# EAGLE board Nano XBee (EAGLE 7.0.0)
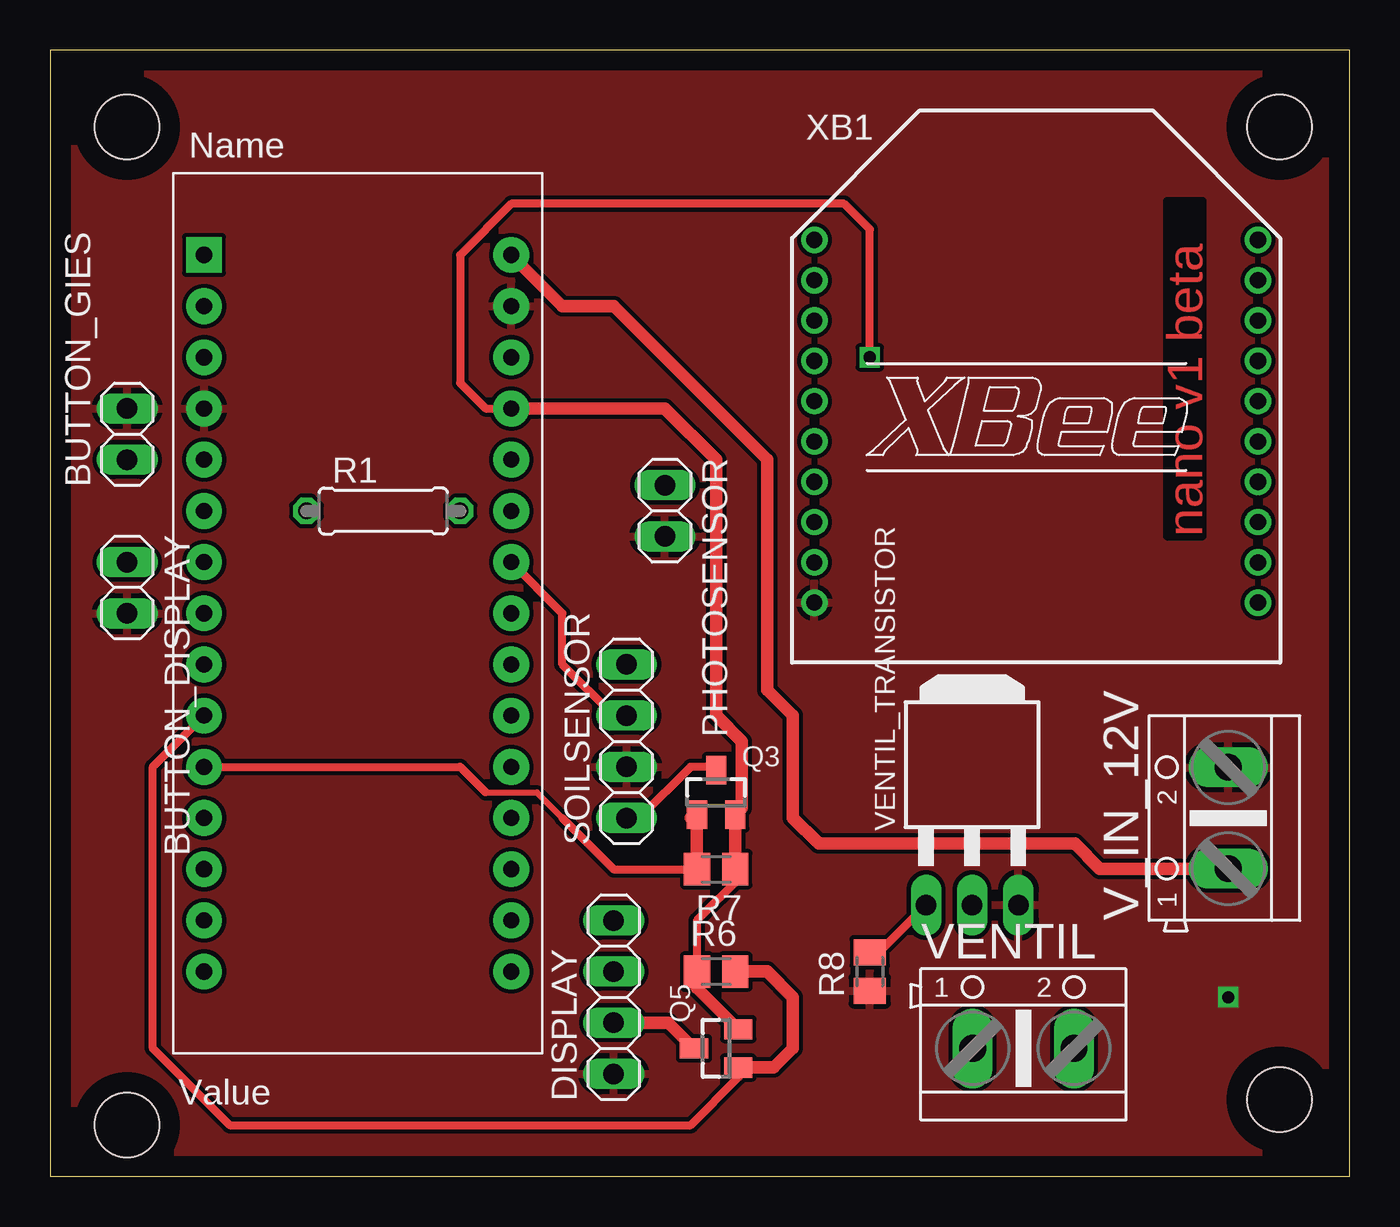
[diagram p0: board, top side]
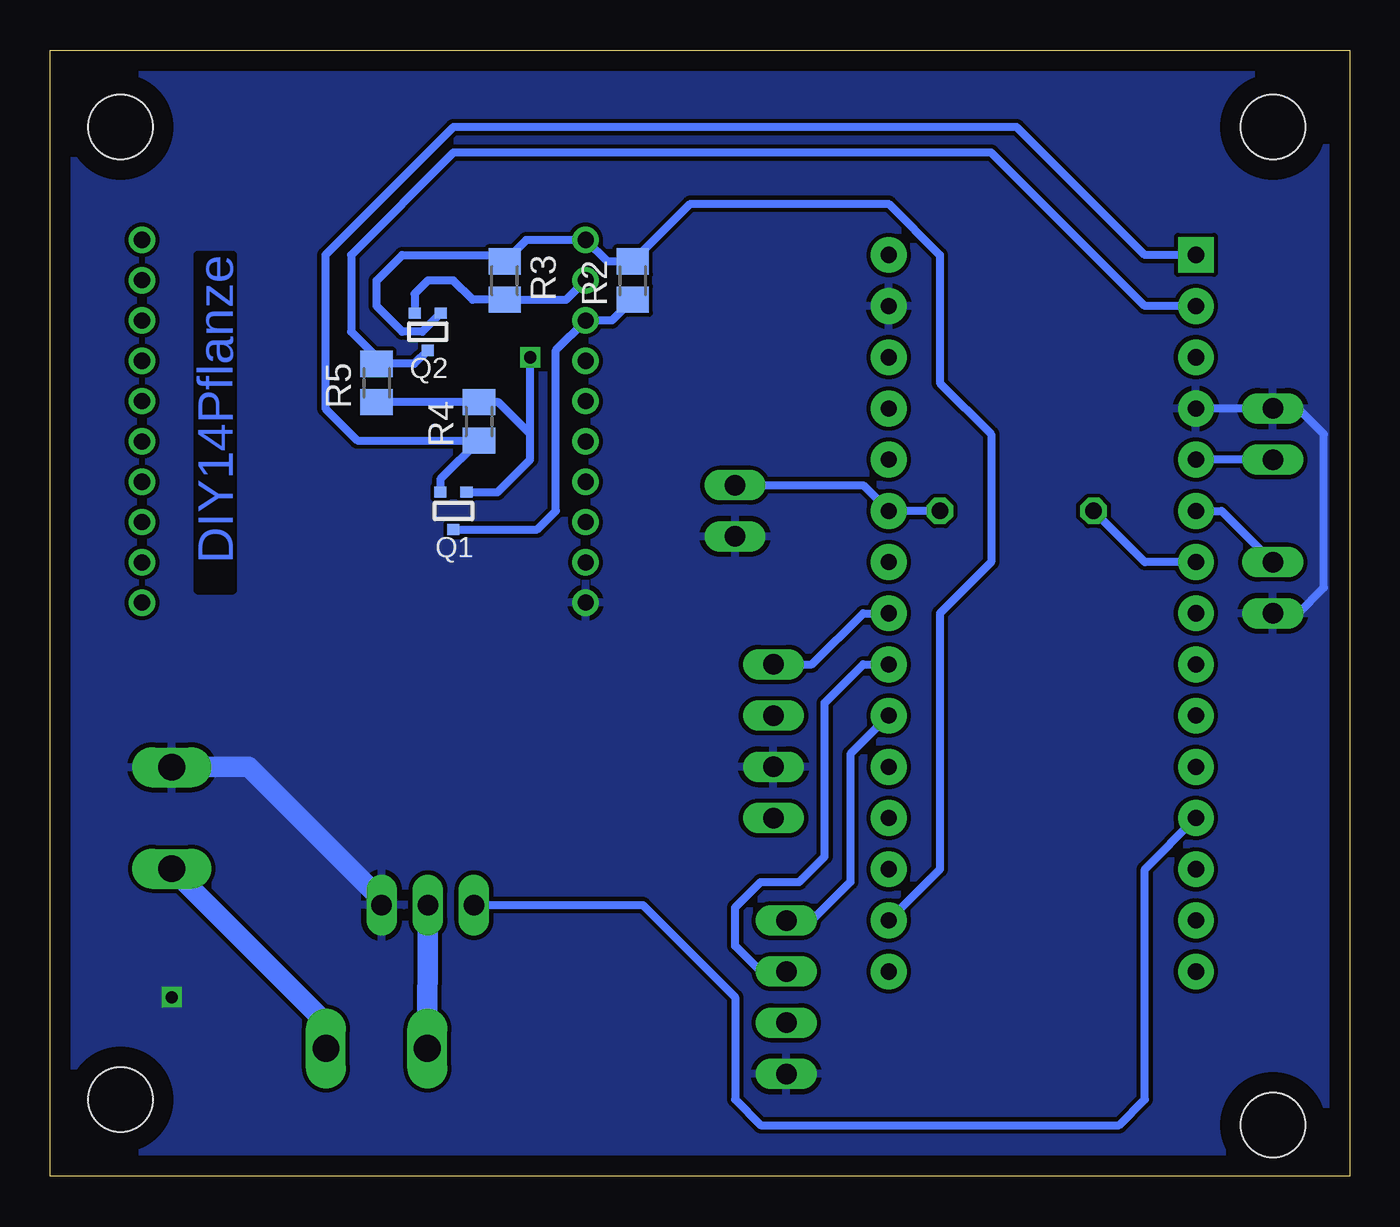
[diagram p1: board, bottom side, seen from below]

Size 64.44 x 55.87 mm. Coordinates in mm from the lower left corner, seen from the top.
Outline: 0,0 64.44,0 64.44,55.87 0,55.87 0,0
Copper layers (1*16): Top 0.035mm / dielectric 1.5mm / Bottom 0.035mm
Design rules "default": minimum track width 10mil, minimum drill 24mil, track to track 8mil, track to pad 8mil, pad to pad 8mil, via to via 8mil, smd to smd 8mil, copper to edge 40mil, drill to drill 8mil, minimum pad ring 10mil, minimum via ring 8mil, stop-mask expansion 4mil, vias tented up to drill 0mil, thermal gap 10mil
Holes 3.2 mm at 3.81,2.54 60.96,52.07 3.81,52.07 60.96,3.81

## Footprints (pad centres in the part's own frame; a part is rotated, then mirrored left to right if it is on the bottom)
1X02 = drill 1.016 long: 1 -1.27,0; 2 1.27,0
1X04 = drill 1.016 long: 1 -3.81,0; 2 -1.27,0; 3 1.27,0; 4 3.81,0
SOT323-R = smd 0.6 x 0.55: 1 -0.65,-0.925; 2 0.65,-0.925; 3 0,0.925
SSOT-3 = smd 1 x 1.4: 1 -0.95,-1.1; 2 0.95,-1.1; 3 0,1.1
0207/7 = drill 0.813 octagon: 1 -3.81,0; 2 3.81,0
M0805 = smd 1.3 x 1.6: 1 -0.95,0; 2 0.95,0
PDIP-32 = drill 0.8 pad 1.778: 3V3 15.24,-35.56; +5V 15.24,-10.16; A0 15.24,-12.7; A1 15.24,-15.24; A2 15.24,-17.78; A3 15.24,-20.32; A4 15.24,-22.86; A5 15.24,-25.4; A6 15.24,-27.94; A7 15.24,-30.48; AREF 15.24,-33.02; D0/RX 0,-5.08; D2 0,-12.7; D3 0,-15.24; D4 0,-17.78; D5 0,-20.32; D6 0,-22.86; D7 0,-25.4; D8 0,-27.94; D9 0,-30.48; D10 0,-33.02; D11 0,-35.56; D12 0,-38.1; D13 15.24,-38.1; GND 0,-10.16; GND1 15.24,-5.08; RESET 0,-7.62; RESET1 15.24,-7.62; VIN 15.24,-2.54 | drill 0.8 pad 1.778 square: D1/TX 0,-2.54
AK500/2 = drill 1.321 long: 1 -2.515,0; 2 2.515,0
IPAK = drill 1.016 long: 1 -2.286,-3.683; 2 0,-3.683; 3 2.286,-3.683
XBEE = drill 0.8 pad 1.27: 1 -11,9; 2 -11,7; 3 -11,5; 4 -11,3; 5 -11,1; 6 -11,-1; 7 -11,-3; 8 -11,-5; 9 -11,-7; 10 -11,-9; 11 11,-9; 12 11,-7; 13 11,-5; 14 11,-3; 15 11,-1; 16 11,1; 17 11,3; 18 11,5; 19 11,7; 20 11,9

## Placement (x,y rotation side)
BUTTON_DISPLAY  [1X02]  3.81,29.21 270 top
BUTTON_GIES  [1X02]  3.81,36.83 90 top
DISPLAY  [1X04]  27.94,8.89 90 top
PHOTOSENSOR  [1X02]  30.48,33.02 270 top
Q1  BSS138W  [SOT323-R]  44.45,33.02 180 bottom
Q2  BSS138W  [SOT323-R]  45.72,41.91 180 bottom
Q3  FDN302P  [SSOT-3]  33.02,19.05 0 top
Q5  FDN302P  [SSOT-3]  33.02,6.35 90 top
R1  [0207/7]  16.51,33.02 0 top
R2  [M0805]  35.56,44.45 90 bottom
R3  [M0805]  41.91,44.45 270 bottom
R4  [M0805]  43.18,37.47 90 bottom
R5  [M0805]  48.26,39.37 90 bottom
R6  [M0805]  33.02,10.16 0 top
R7  [M0805]  33.02,15.24 180 top
R8  [M0805]  40.64,10.16 90 top
SOILSENSOR  [1X04]  28.57,21.59 90 top
U$1  ARDUINONANO  [PDIP-32]  7.62,48.26 0 top
V_IN_12V  [AK500/2]  58.42,17.78 90 top
VENTIL  [AK500/2]  48.26,6.35 0 top
VENTIL_TRANSISTOR  VND7NV04-1  [IPAK]  45.72,17.14 0 top
XB1  XBEE  [XBEE]  48.9,37.47 0 top

## Library data of the parts
BUTTON_DISPLAY BUTTON_GIES DISPLAY PHOTOSENSOR SOILSENSOR = pinhead
Q1-Q3 Q5 VENTIL_TRANSISTOR = transistor-fet
R1-R8 = rcl
U$1 = jet-lib
V_IN_12V VENTIL = con-ptr500; OC_FARNELL: unknown; OC_NEWARK: unknown
XB1 = maxstream; MPN: XBP24-Z7UIT-004; OC_FARNELL: 1751799; OC_NEWARK: 34R5507

## Nets
+3V3: Q2.1 R2.2 R3.1 U$1.3V3 XB1.1
+5V: Q1.1 Q3.2 Q5.2 R4.2 R5.1 R6.1 R7.1 U$1.+5V
+12V: U$1.VIN V_IN_12V.1 VENTIL.2
ANALOG_PHOTO: PHOTOSENSOR.1 R1.2 U$1.A1
BODEN_ANALOG: SOILSENSOR.3 U$1.A2
BODEN_DIGITAL: SOILSENSOR.4 U$1.A3
DISPLAY_BUTTON: BUTTON_DISPLAY.1 U$1.D3
DISPLAY_ON: Q5.1 R6.2 U$1.D7
GIES_BUTTON: BUTTON_GIES.1 U$1.D2
GND: BUTTON_DISPLAY.2 BUTTON_GIES.2 DISPLAY.1 PHOTOSENSOR.2 R8.1 SOILSENSOR.2 U$1.GND U$1.GND1 V_IN_12V.2 VENTIL_TRANSISTOR.3 XB1.10
N$1: DISPLAY.2 Q5.3
N$2: VENTIL.1 VENTIL_TRANSISTOR.2
N$3: Q3.3 SOILSENSOR.1
N$5: U$1.D11
N$8: Q2.2 R3.2 XB1.2
N$9: Q1.3 R2.1 XB1.3
RXD: Q2.3 R5.2 U$1.D0/RX
SCL: DISPLAY.4 U$1.A5
SDA: DISPLAY.3 U$1.A4
SENSOR_ON: Q3.1 R7.2 U$1.D8
TXD: Q1.2 R4.1 U$1.D1/TX
V_IN_PHOTO: R1.1 U$1.D4
VENTIL_CTL: R8.2 U$1.D9 VENTIL_TRANSISTOR.1

## Tracks (layer width: path | path; a pad name or v marks a point on that pad's centre or on a via)
+3V3
  Bottom 0.406: Q2.1 45.99,41.91 46.99,41.91 48.26,43.18 48.26,44.45 46.99,45.72 41.91,45.72 R3.1 40.84,46.47 XB1.1 36.83,45.4 R2.2 32.7,48.26 22.86,48.26 20.32,45.72 20.32,39.37 17.78,36.83 17.78,30.48 20.32,27.94 20.32,15.24 U$1.3V3
+5V  (via drill 0.6)
  Top 0.406: 34.29,14.92 32.07,12.7 R6.1 | v40.64,40.64 40.64,46.99 39.37,48.26 22.86,48.26 20.32,45.72 20.32,39.37 21.59,38.1 U$1.+5V
  Top 0.61: 34.29,14.92 R7.1 Q3.2 34.29,18.27 34.29,21.59 33.02,22.86 33.02,35.56 30.48,38.1 U$1.+5V | R6.1 32.07,9.35 Q5.2
  Bottom 0.406: 48.26,38.1 R5.1 R4.2 42.23,38.41 40.64,36.83 | Q1.1 42.26,33.95 40.64,35.56 40.64,36.83 | 40.64,36.83 v40.64,40.64
+12V
  Top 0.61: V_IN_12V.1 52.05,15.27 50.8,16.51 38.1,16.51 36.83,17.78 36.83,22.86 35.56,24.13 35.56,35.56 27.94,43.18 25.4,43.18 U$1.VIN
  Bottom 1.016: VENTIL.2 50.77,7.62 V_IN_12V.1
ANALOG_PHOTO
  Bottom 0.406: R1.2 U$1.A1 24.13,34.29 PHOTOSENSOR.1
BODEN_ANALOG
  Top 0.406: SOILSENSOR.3 27.94,22.86 25.4,25.4 25.4,27.94 U$1.A2
BODEN_DIGITAL
  Bottom 0.406: SOILSENSOR.4 26.67,25.4 24.13,27.94 U$1.A3
DISPLAY_BUTTON
  Bottom 0.406: U$1.D3 6.35,33.02 BUTTON_DISPLAY.1
DISPLAY_ON
  Top 0.406: Q5.1 34.12,4.91 31.75,2.54 8.89,2.54 5.08,6.35 5.08,20.32 U$1.D7
  Top 0.61: Q5.1 35.88,5.4 36.83,6.35 36.83,8.89 35.56,10.16 R6.2
GIES_BUTTON
  Bottom 0.406: BUTTON_GIES.1 U$1.D2
GND  (via drill 0.6 pad 0.81)
  Bottom 0.406: BUTTON_DISPLAY.2 2.54,27.94 1.27,29.21 1.27,36.83 2.54,38.1 BUTTON_GIES.2 U$1.GND
  Bottom 1.016: VENTIL_TRANSISTOR.3 48.01,13.72 54.61,20.32 58.4,20.32 V_IN_12V.2
  other vias: 58.42,8.89
  pour Bottom: 0,55.88 64.77,55.88 64.77,54.61 64.77,0 0,0
  pour Top: 0,55.88 64.77,55.88 64.77,53.34 64.77,0 0,0
N$1
  Top 0.61: Q5.3 30.65,7.62 DISPLAY.2
N$2
  Bottom 1.016: VENTIL.1 45.74,8.87 45.72,10.16 VENTIL_TRANSISTOR.2
N$3
  Top 0.406: Q3.3 32.85,20.32 31.75,20.32 29.21,17.78 SOILSENSOR.1
N$8
  Bottom 0.406: XB1.2 38.86,43.5 R3.2 43.5,43.5 44.45,44.45 45.72,44.45 46.37,43.8 Q2.2
N$9
  Bottom 0.406: R2.1 36.59,42.47 XB1.3 39.37,40.99 39.37,33.02 40.3,32.09 Q1.3
RXD
  Bottom 0.406: Q2.3 46.38,40.32 R5.2 48.26,40.64 49.53,41.91 49.53,45.72 44.45,50.8 17.78,50.8 10.16,43.18 U$1.D0/RX
SCL
  Bottom 0.406: U$1.A5 24.77,20.95 24.77,14.61 26.67,12.7 DISPLAY.4
SDA
  Bottom 0.406: DISPLAY.3 29.21,10.16 30.48,11.43 30.48,13.34 29.21,14.61 27.3,14.61 26.04,15.88 26.04,23.5 24.13,25.4 U$1.A4
SENSOR_ON
  Top 0.305: 21.59,19.05 24.13,19.05 25.4,17.78
  Top 0.406: U$1.D8 20.32,20.32 21.59,19.05 | 25.4,17.78 27.94,15.24 R7.2
  Top 0.61: Q3.1 31.9,17.78 31.75,17.78 32.07,17.46 R7.2
TXD
  Bottom 0.406: Q1.2 45.1,34.59 R4.1 49.22,36.52 50.8,38.1 50.8,45.72 44.45,52.07 16.51,52.07 10.16,45.72 U$1.D1/TX
V_IN_PHOTO
  Bottom 0.406: U$1.D4 10.16,30.48 R1.1
VENTIL_CTL
  Top 0.406: R8.2 41.08,11.11 VENTIL_TRANSISTOR.1
  Bottom 0.406: VENTIL_TRANSISTOR.1 35.05,13.46 30.48,8.89 30.48,3.81 29.21,2.54 11.43,2.54 10.16,3.81 10.16,15.24 U$1.D9

## Text on the board
Top: nano v1 beta
Bottom: DIY14Pflanze